# Altium PCB PCB2.PcbDoc
Units mil, origin at the board's own origin, x right, y up, seen from the top; angles counter-clockwise.
Board outline 2975 x 1475 mil, 2 copper layers (Top Layer, Bottom Layer); 20 components, 15 nets, 71 pads, 1 vias.
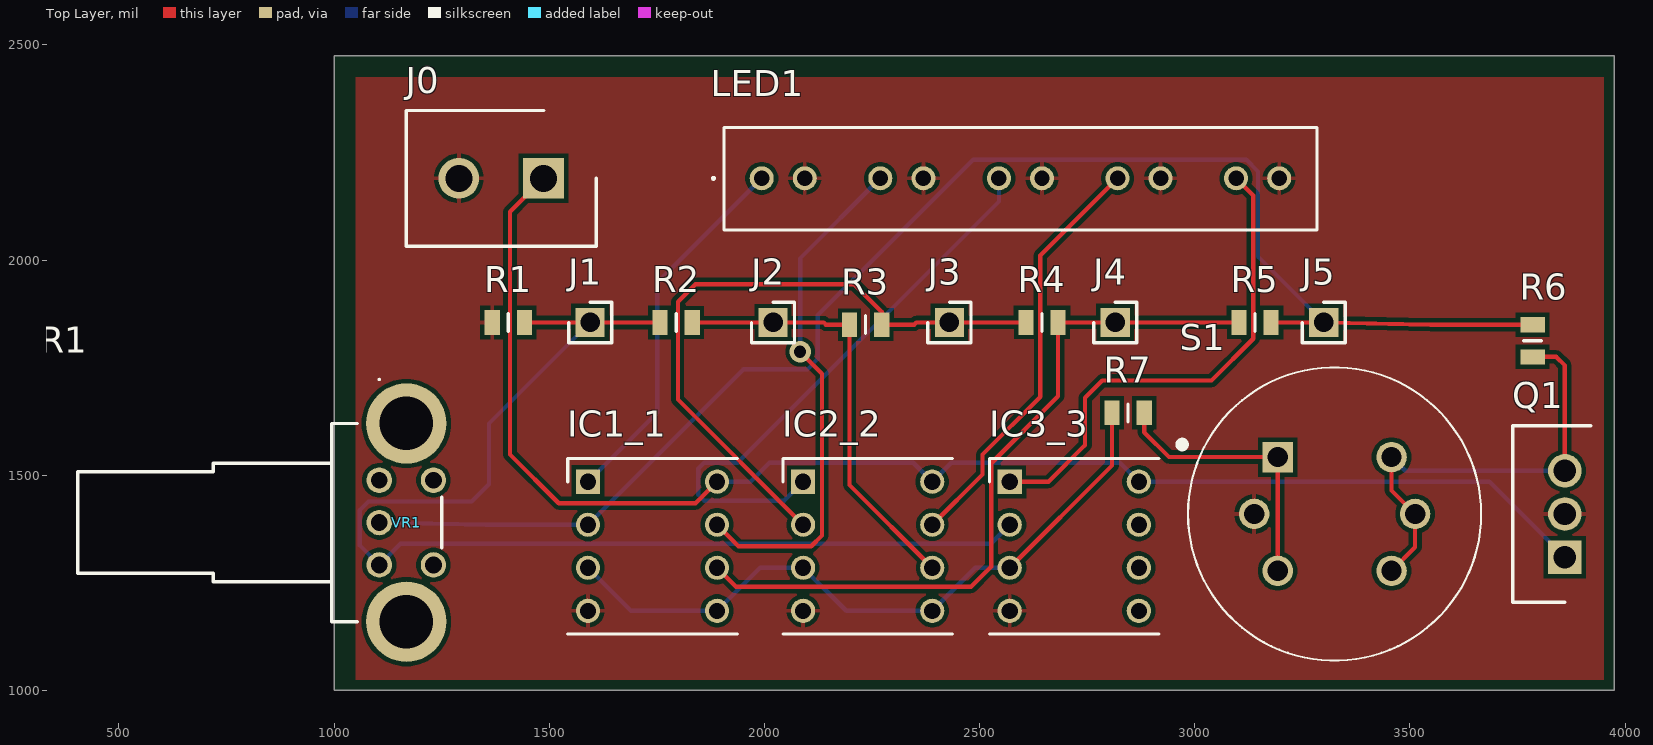
[diagram p0: Top Layer view]
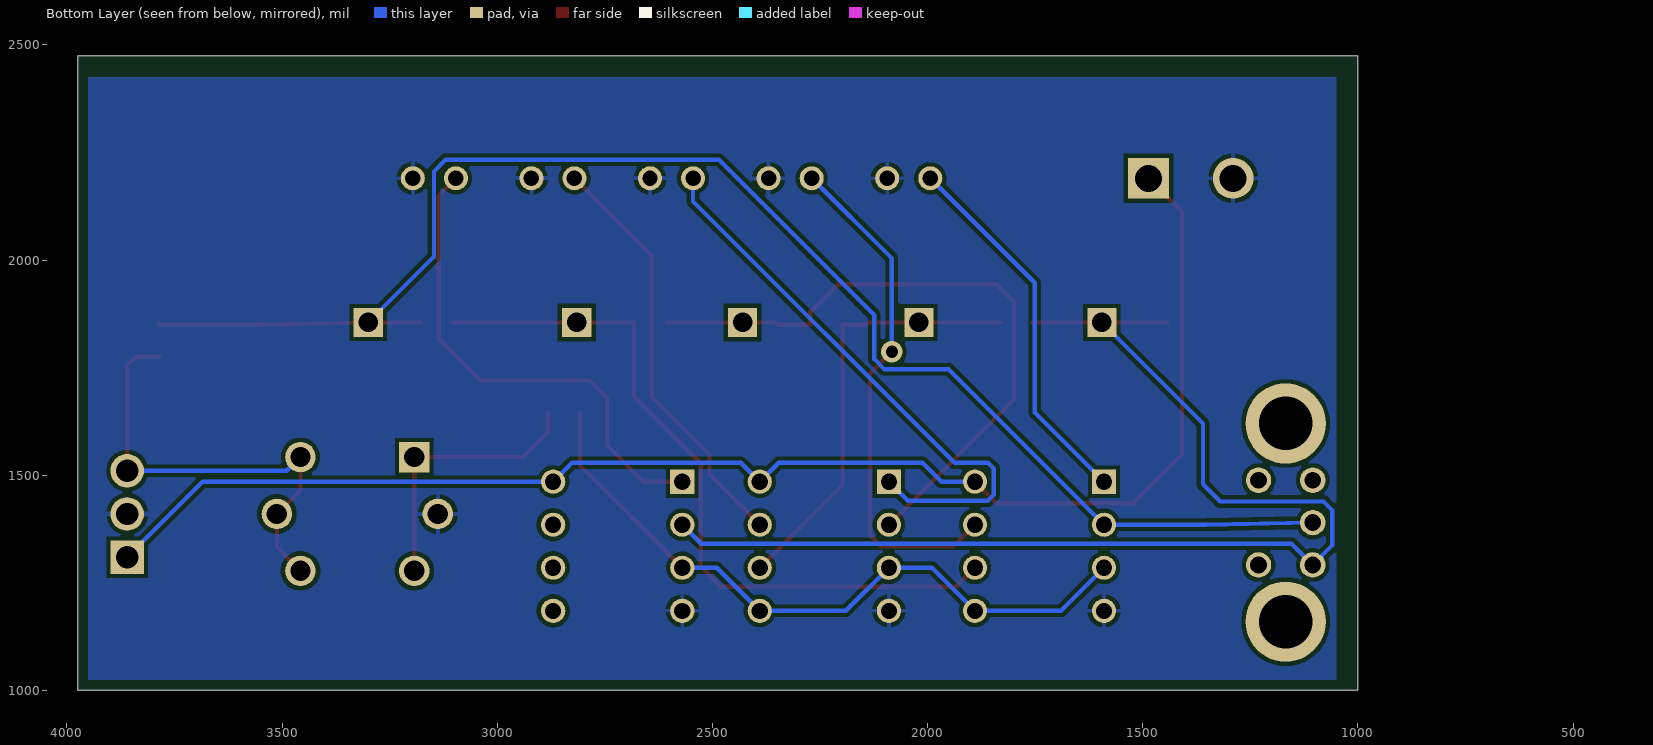
[diagram p1: Bottom Layer view, seen from below]
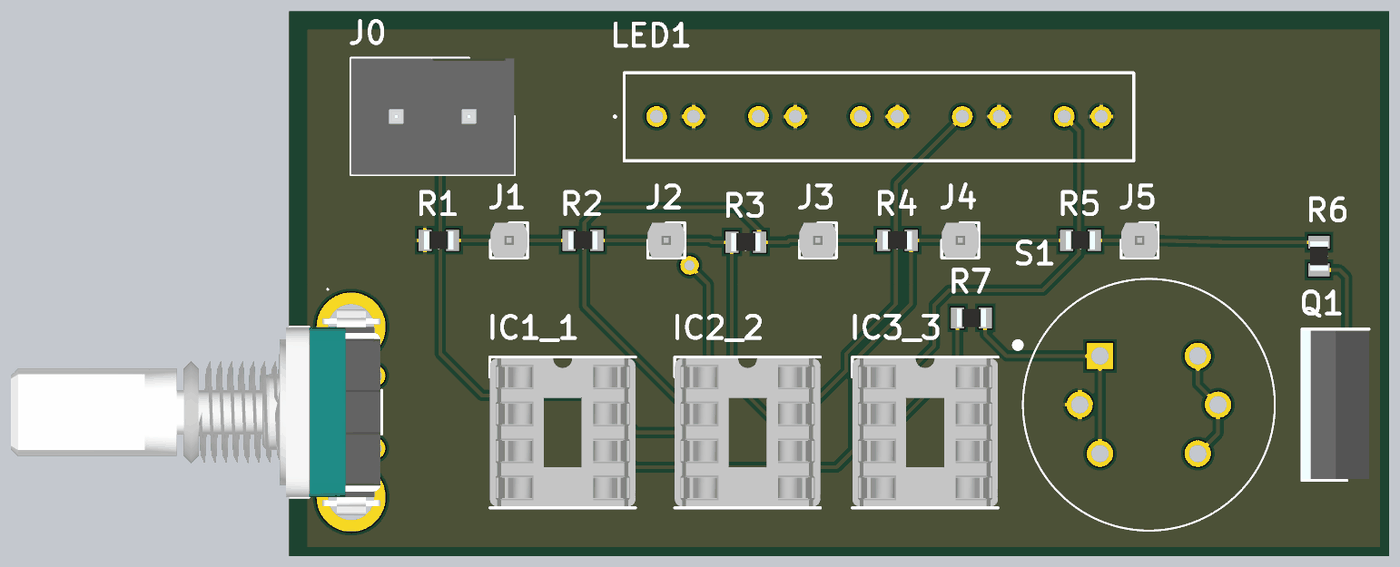
[diagram p2: 3D render of the assembled board from above, using the file's embedded part models]

## Layer stack, top to bottom
Top Solder: solder mask 0.4, Solder Resist, Dk 3.5
Top Layer: signal copper 1.4
Dielectric 1: dielectric 12.6, FR-4, Dk 4.8
Bottom Layer: signal copper 1.4
Bottom Solder: solder mask 0.4, Solder Resist, Dk 3.5

## Board outline
1000,1000 3975,1000 3975,2475 1000,2475

## Design rules (kind name [scope] priority, off if disabled: settings)
Clearance [All] p1: gap=10 ignorepadtopadclearanceinfootprint=FALSE except(0: Arc-Hole Track-Hole SMDPad-Hole THPad-Hole Via-Hole Fill-Hole Poly-Hole Region-Hole Text-Hole)
PolygonConnect [All] p1: connectstyle=Relief reliefconductorwidth=10 reliefentries=4 polygonreliefangle="90 Angle" airgapwidth=10
RoutingVias [All] p1: holewidth=28 width=50 viastyle="Through Hole" minholewidth=28 minwidth=50 maxholewidth=28 maxwidth=50
SolderMaskExpansion [All] p1: expansion=4 istentingtop=FALSE
Width [All] p1: maxlimit=10 minlimit=10 preferedwidth=10
30 further rules are at their usual default settings.

## Components (designator, comment, footprint, x,y, rotation, side; value= is the part's Value field where it differs from the comment)
IC1_1 "1-2199298-2" DIPS762W70P254L1016H510Q8N 1590,1485 r0 top
IC2_2 "1-2199298-2" DIPS762W70P254L1016H510Q8N 2090,1485 r0 top
IC3_3 "1-2199298-2" DIPS762W70P254L1016H510Q8N 2570,1485 r0 top
J0 "Screwheader" SHDR2W100P0X500_1X2_1120X800X1100P 1486.85,2190 r180 top
J1 "68024-100HLF" HDRV1W67P0X254_1X1_254X241X1082P 1595,1855 r0 top
J2 "68024-100HLF" HDRV1W67P0X254_1X1_254X241X1082P 2020,1855 r0 top
J3 "68024-100HLF" HDRV1W67P0X254_1X1_254X241X1082P 2430,1855 r0 top
J4 "68024-100HLF" HDRV1W67P0X254_1X1_254X241X1082P 2815,1855 r0 top
J5 "68024-100HLF" HDRV1W67P0X254_1X1_254X241X1082P 3300,1855 r0 top
LED1 "SSA-LXB525ID" SSALXB525ID 1993.82,2190 r0 top
Q1 "Regulator" TO255P460X1020X1968-3P 3860,1309.61 r90 top
R1 "MCU0805MD3304BP500" RESC2012X62N 1405,1855 r0 top
R2 "MCU0805MD3304BP500" RESC2012X62N 1795,1855 r0 top
R3 "MCU0805MD3304BP500" RESC2012X62N 2235,1850 r0 top
R4 "MCU0805MD3304BP500" RESC2012X62N 2645,1855 r0 top
R5 "MCU0805MD3304BP500" RESC2012X62N 3140,1855 r0 top
R6 "MCU0805MD3304BP500" RESC2012X62N 3785,1812.4 r270 top
R7 "MCU0805MD3304BP500" RESC2012X62N 2845,1645 r0 top
S1 "Sensor" XDCR_SEN-08880 3325,1410 r0 top
VR1 "PRS11R-215F-S103B1" PRS11R215FS103B1 1105,1488.43 r270 top

## Footprints (in the part's own frame and the unit in brackets; to place one, negate y for a bottom-side part, rotate by r counter-clockwise, add the part's x,y. Pads: shape width x height; smd on the part's side, far side on the other; paste and mask are expansions set on the pad)
DIPS762W70P254L1016H510Q8N [mm]
  rect 1.425x1.425 hole 0.95: 1(0,0)
  round 1.425 hole 0.95: 2(0,-2.54) 3(0,-5.08) 4(0,-7.62) 5(7.62,-7.62) 6(7.62,-5.08) 7(7.62,-2.54) 8(7.62,0)
  silkscreen extent -1.19,-8.99 8.81,1.37, body extent -1.19,-8.89 8.81,1.27, height 4.84
HDRV1W67P0X254_1X1_254X241X1082P [mm]
  rect 1.725x1.725 hole 1.15: 1(0,0)
  silkscreen extent -1.27,-1.2 1.27,1.2, body extent -1.27,-1.21 1.27,1.21, height 10.61
PRS11R215FS103B1 [mm]
  round 1.5 hole 1: 1(0,0) 2(2.5,0) 3(5,0) 4(0,3.2) 5(5,3.2)
  round 4.74 hole 3.16: MH1(-3.35,1.6) MH2(8.35,1.6)
  silkscreen extent -6,-17.8 8.35,3.7, body extent -4.54,-21.78 9.55,3.62, height 13.11
RESC2012X62N [mm]
  rect 0.9x1.45 smd: 1(-0.95,0) 2(0.95,0)
  silkscreen extent 0,-0.53 0,0.53, body extent -1,-0.63 1,0.63, height 0.62
SHDR2W100P0X500_1X2_1120X800X1100P [mm]
  rect 2.4x2.4 hole 1.6: 1(0,0)
  round 2.4 hole 1.6: 2(5,0)
  silkscreen extent -3.1,-4 8.1,4, body extent -3.1,-4 8.1,4, height 11
SSALXB525ID [mm]
  round 1.416 hole 0.91: A1(0,0) A2(7,0) A3(14,0) A4(21,0) A5(28,0) B1(2.54,0) B2(9.54,0) B3(16.54,0) B4(23.54,0) B5(30.54,0)
  silkscreen extent -2.9,-3.05 32.77,3, body extent -3.11,-3.94 33.59,3.94, height 0.25
TO255P460X1020X1968-3P [mm]
  rect 1.98x1.98 hole 1.32: 1(0,0)
  round 1.98 hole 1.32: 2(2.55,0) 3(5.1,0)
  silkscreen extent -2.65,-1.53 7.75,3.07, body extent -2.55,-1.53 7.65,3.07, height 19.68
XDCR_SEN-08880 [mm]
  rect 1.8x1.8 hole 1.2: 1(-3.359,3.359)
  round 1.8 hole 1.2: 2(-4.75,0) 3(-3.359,-3.359) 4(3.359,-3.359) 5(4.75,0) 6(3.359,3.359)
  silkscreen extent -9.2,-8.65 8.65,8.65

## Part data
IC1_1 IC2_2 IC3_3: "Integrated Circuit", Manufacturer_Name="TE Connectivity", Mouser Part Number=571-1-2199298-2, Arrow Part Number=1-2199298-2, Arrow Price/Stock=https://www.arrow.com/en/products/1-2199298-2/te-connectivity?region=nac, Datasheet Link=https://componentsearchengine.com/Datasheets/2/1-2199298-2.pdf, Height=5.1mm, Manufacturer_Part_Number=1-2199298-2, Mouser Price/Stock=https://www.mouser.co.uk/ProductDetail/TE-Connectivity/1-2199298-2?qs=fK8dlpkaUMtEKa4wabwOXQ%3D%3D
J0: library part 691111710002, "Connector", Manufacturer_Name="Wurth Elektronik", Mouser Part Number=710-691111710002, Datasheet Link=https://componentsearchengine.com/Datasheets/1/691111710002.pdf, Height=11mm, Manufacturer_Part_Number=691111710002, Mouser Price/Stock=https://www.mouser.co.uk/ProductDetail/Wurth-Elektronik/691111710002?qs=E2PpAYvlWVvK4tIr6ZnZIQ%3D%3D
J1 J2 J3 J4 J5: "Connector", Manufacturer_Name="Amphenol Communications Solutions", Mouser Part Number=649-68024-100HLF, Arrow Part Number=68024-100HLF, Arrow Price/Stock=https://www.arrow.com/en/products/68024-100hlf/amphenol-fci?region=nac, Datasheet Link=https://cdn.amphenol-cs.com/media/wysiwyg/files/drawing/68000.pdf, Height=10.82mm, Manufacturer_Part_Number=68024-100HLF, Mouser Price/Stock=https://www.mouser.co.uk/ProductDetail/Amphenol-FCI/68024-100HLF?qs=DaoqcPPPDvU%252BhB9srASBgQ%3D%3D
LED1: "LED (Multiple)", Manufacturer_Name=Lumex, Mouser Part Number=696-SSA-LXB525ID, Arrow Part Number=SSA-LXB525ID, Arrow Price/Stock=https://www.arrow.com/en/products/ssa-lxb525id/lumex, Datasheet Link=https://datasheet.datasheetarchive.com/originals/dk/DKDS-14/273372.pdf, Height=8.4mm, Manufacturer_Part_Number=SSA-LXB525ID, Mouser Price/Stock=https://www.mouser.co.uk/ProductDetail/Lumex/SSA-LXB525ID?qs=K%252Bxkc0srH7Bjt6LUAQzTgQ%3D%3D
Q1: library part L7805ACV-DG, "Transistor", Manufacturer_Name=STMicroelectronics, Mouser Part Number=511-L7805ACV-DG, Arrow Part Number=L7805ACV-DG, Arrow Price/Stock=https://www.arrow.com/en/products/l7805acv-dg/stmicroelectronics?region=europe, Datasheet Link=https://rs.componentsearchengine.com/Datasheets/2/L7805ACV-DG.pdf, Height=4.6mm, Manufacturer_Part_Number=L7805ACV-DG, Mouser Price/Stock=https://www.mouser.co.uk/ProductDetail/STMicroelectronics/L7805ACV-DG?qs=UOUhb9503hEO7qX1qhGGyg%3D%3D
R1 R2 R3 R4 R5 R6 R7: "Resistor", Manufacturer_Name=Vishay, Mouser Part Number=594-MCU0805MD3304BP5, Datasheet Link=https://www.mouser.in/datasheet/2/427/mc_at_precision-1762846.pdf, Height=0.62mm, Manufacturer_Part_Number=MCU0805MD3304BP500, Mouser Price/Stock=https://www.mouser.co.uk/ProductDetail/Vishay-Beyschlag/MCU0805MD3304BP500?qs=A6eO%252BMLsxmSZlVWVx087zg%3D%3D
VR1: "Variable Resistor", Manufacturer_Name=Bourns, Mouser Part Number=652-PRS11R215FS103B1, Datasheet Link=https://www.mouser.com/catalog/specsheets/Bourns_03252021_PRS11R_datasheet.pdf, Height=13.1mm, Manufacturer_Part_Number=PRS11R-215F-S103B1, Mouser Price/Stock=https://www.mouser.co.uk/ProductDetail/Bourns/PRS11R-215F-S103B1?qs=IS%252B4QmGtzzqZRwzYowTZrA%3D%3D

## Via types
v1: diameter 50, hole 28, Top Layer to Bottom Layer, 1 vias

## Nets (pads, with @x,y where several pads share a name; then routed paths per layer and width w, separated by ;. In a path a pad name is that pad's centre, name@x,y a point inside that pad or via, vN(x,y) a via of type N, cw(c..) or ccw(c..) an arc to the next point about the centre after c; other vN are vias at no path point)
GND: IC1_1.4 IC2_2.4 IC3_3.4 J0.2 LED1.B1 LED1.B2 LED1.B3 LED1.B4 LED1.B5 Q1.2 R1.1 S1.2
NetIC1_1_1: IC1_1.1 LED1.A1 | length 872.3
  Bottom Layer w10: IC1_1.1 1751,1646 1751,1947.18 LED1.A1
NetIC1_1_2: IC1_1.2 J5.1 R5.2 R6.1 VR1.2 | length 3486.2
  Top Layer w10: R5.2 J5.1 3547.2,1849.8 R6.1
  Bottom Layer w10: VR1.2 1353,1385 IC1_1.2 1951.04,1746.04 2100,1746.04 2123.73,1769.77 2123.73,1871.73 2485,2233 3120,2233 3147,2206 3147,2008 J5.1
NetIC1_1_3: IC1_1.3 IC1_1.5 IC2_2.3 IC2_2.5 IC3_3.3 R7.1 | length 1604.1
  Top Layer w10: IC3_3.3 2807.6,1522.6 R7.1
  Bottom Layer w10: IC1_1.3 1690,1185 IC1_1.5 1990,1285 IC2_2.3 2190,1185 IC2_2.5 2490,1285 IC3_3.3
NetIC1_1_6: IC1_1.6 J4.1 R4.2 R5.1 | length 1726.3
  Top Layer w10: IC1_1.6 1934,1241 2480,1241 2526.95,1287.95 2526.95,1528.05 2682.4,1683.51 R4.2 J4.1 R5.1
NetIC1_1_7: IC1_1.7 LED1.A2 | length 1203.4
  Top Layer w10: IC1_1.7 1940,1335 2109,1335 2134,1360 2134,1736 v1(2083,1787)
  Bottom Layer w10: v1(2083,1787) 2083,2003.59 LED1.A2
NetIC1_1_8: IC1_1.8 IC2_2.8 IC3_3.8 J0.1 Q1.1 | length 3338.3
  Top Layer w10: J0.1 1409,2112.15 1409,1548 1522,1435 1840,1435 IC1_1.8
  Bottom Layer w10: IC1_1.8 1968,1485 2012,1529 2346,1529 IC2_2.8 2434,1529 2826,1529 IC3_3.8 3684.61,1485 Q1.1
NetIC2_2_1: IC2_2.1 LED1.A3 | length 1338.1
  Bottom Layer w10: IC2_2.1 2046,1441 1860,1441 1846,1455 1846,1515 1860,1529 1937.66,1529 2545,2136.34 LED1.A3
NetIC2_2_2: IC2_2.2 J3.1 R3.2 R4.1 | length 1522.7
  Top Layer w10: IC2_2.2 1799,1676 1799,1903 1840,1944 2208.4,1944 2272.4,1880 R3.2 2348,1850 2353,1855 J3.1 R4.1
NetIC2_2_6: IC2_2.6 J2.1 R2.2 R3.1 | length 1012
  Top Layer w10: R2.2 J2.1 2137.81,1855 2142.81,1850 R3.1 2197.6,1477.4 IC2_2.6
NetIC2_2_7: IC2_2.7 LED1.A4 | length 983.4
  Top Layer w10: IC2_2.7 2506.95,1501.95 2506.95,1548.05 2641,1682.1 2641,2010.41 LED1.A4
NetIC3_3_1: IC3_3.1 LED1.A5 | length 1157.4
  Top Layer w10: IC3_3.1 2660,1485 2745,1570 2745,1680 2785,1720 3039,1720 3136,1817 3136,2150.18 LED1.A5
NetIC3_3_2: IC3_3.2 J1.1 R1.2 R2.1 VR1.3 | length 2763.2
  Top Layer w10: R1.2 J1.1 R2.1
  Bottom Layer w10: J1.1 1360,1620 1360,1479 1320,1439 1080,1439 1060,1419 1060,1336.57 VR1.3 1154.43,1341 2526,1341 IC3_3.2
NetQ1_3: Q1.3 R6.2 S1.4 S1.5 S1.6 | length 1053.7
  Top Layer w10: S1.4 3512.01,1332.54 S1.5 3457.23,1464.77 S1.6 ; R6.2 3840,1775 3860,1755 Q1.3
  Bottom Layer w10: S1.6 3489.07,1510.39 Q1.3
NetR7_2: R7.2 S1.1 S1.3 | length 643.8
  Top Layer w10: R7.2 2882.4,1600 2940.17,1542.23 S1.1 S1.3
pads on no net: IC3_3.5 IC3_3.6 IC3_3.7 VR1.1 VR1.4 VR1.5 VR1.MH1 VR1.MH2

## Polygon pours and split planes (outlines as drawn)
GND on Bottom Layer "PolyBoTGND" (solid, pour order 0): 3950,1025 3950,2425 1050,2425 1050,1025
GND on Top Layer "PolyTopGND" (solid, pour order 1): 3950,2425 3950,1025 1050,1025 1050,2425

## Silkscreen, mask and mechanical layers (free items; w line width, h text height)
Board Outline:
  lines w10: 2475,1000 3975,1000 ; 3975,1000 3975,2475 1000,2475 1000,1075 1000,1000 3975,1000